# EAGLE board pybd-breakout (EAGLE 9.3.2)
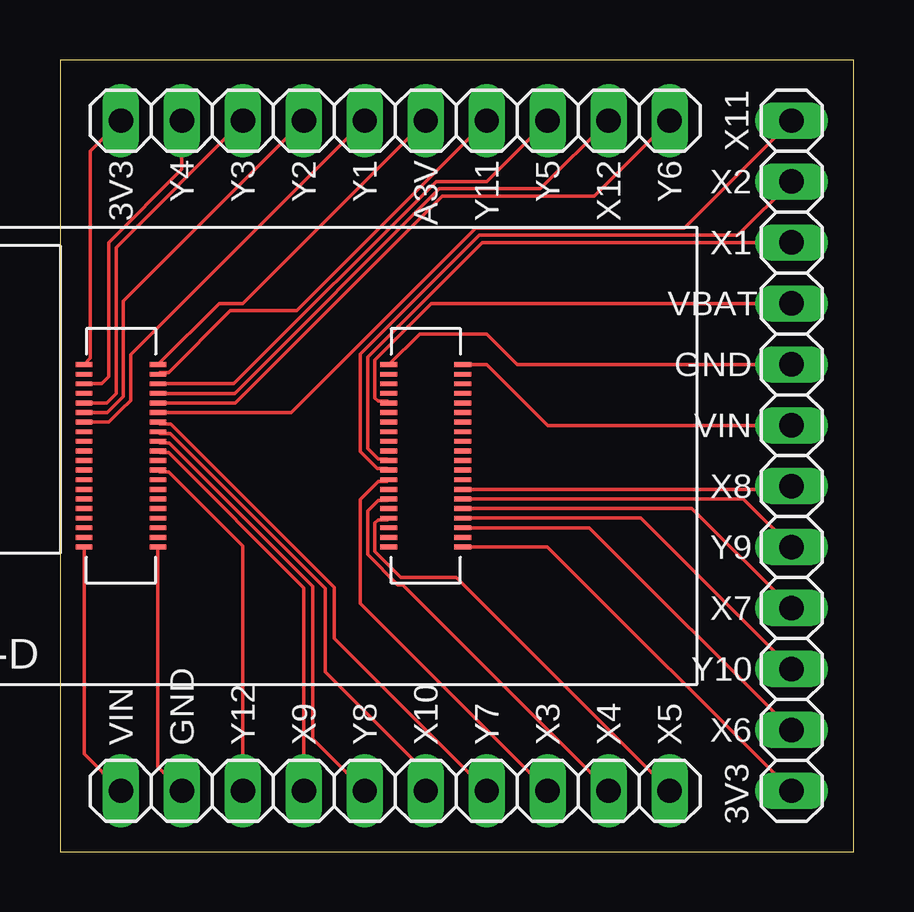
[diagram p0: board, top side]
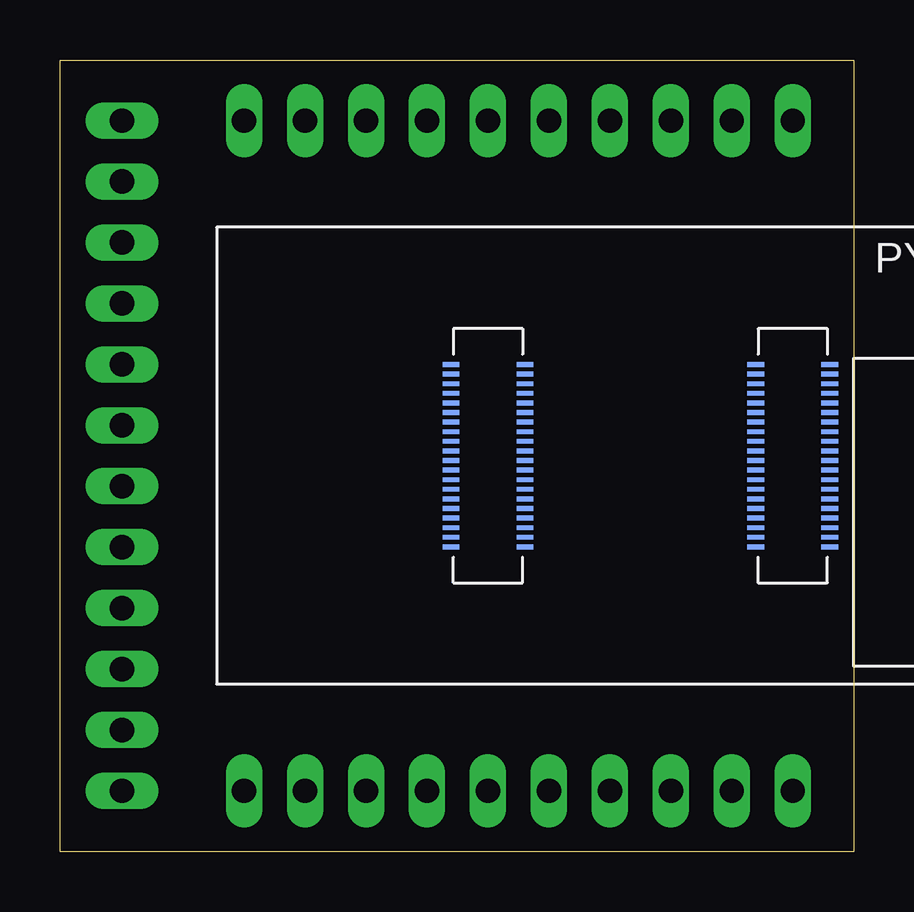
[diagram p1: board, bottom side, seen from below]

Size 33.07 x 33.01 mm. Coordinates in mm from the lower left corner, seen from the top.
Outline: 0,0 33.07,0 33.07,33.01 0,33.01 0,0
Copper layers (1*16): Top 0.035mm / dielectric 1.5mm / Bottom 0.035mm
Design rules "default": minimum track width 6mil, minimum drill 0.35mm, track to track 6mil, track to pad 6mil, pad to pad 6mil, via to via 6mil, smd to smd 6mil, copper to edge 40mil, drill to drill 6mil, minimum pad ring 10mil, minimum via ring 8mil, stop-mask expansion 4mil, vias tented up to drill 0mil, thermal gap 10mil

## Footprints (pad centres in the part's own frame; a part is rotated, then mirrored left to right if it is on the bottom)
1X12 = drill 1.016 long: 1 -13.97,0; 2 -11.43,0; 3 -8.89,0; 4 -6.35,0; 5 -3.81,0; 6 -1.27,0; 7 1.27,0; 8 3.81,0; 9 6.35,0; 10 8.89,0; 11 11.43,0; 12 13.97,0
1X10 = drill 1.016 long: 1 -11.43,0; 2 -8.89,0; 3 -6.35,0; 4 -3.81,0; 5 -1.27,0; 6 1.27,0; 7 3.81,0; 8 6.35,0; 9 8.89,0; 10 11.43,0
PYBD-WBUS = smd 0.7 x 0.2: 1 -4.81,5.07; 2 -7.89,5.07; 3 -4.81,4.67; 4 -7.89,4.67; 5 -4.81,4.27; 6 -7.89,4.27; 7 -4.81,3.87; 8 -7.89,3.87; 9 -4.81,3.47; 10 -7.89,3.47; 11 -4.81,3.07; 12 -7.89,3.07; 13 -4.81,2.67; 14 -7.89,2.67; 15 -4.81,2.27; 16 -7.89,2.27; 17 -4.81,1.87; 18 -7.89,1.87; 19 -4.81,1.47; 20 -7.89,1.47; 21 -4.81,1.07; 22 -7.89,1.07; 23 -4.81,0.67; 24 -7.89,0.67; 25 -4.81,0.27; 26 -7.89,0.27; 27 -4.81,-0.13; 28 -7.89,-0.13; 29 -4.81,-0.53; 30 -7.89,-0.53; 31 -4.81,-0.93; 32 -7.89,-0.93; 33 -4.81,-1.33; 34 -7.89,-1.33; 35 -4.81,-1.73; 36 -7.89,-1.73; 37 -4.81,-2.13; 38 -7.89,-2.13; 39 -4.81,-2.53; 40 -7.89,-2.53; 41 4.81,-2.53; 42 7.89,-2.53; 43 4.81,-2.13; 44 7.89,-2.13; 45 4.81,-1.73; 46 7.89,-1.73; 47 4.81,-1.33; 48 7.89,-1.33; 49 4.81,-0.93; 50 7.89,-0.93; 51 4.81,-0.53; 52 7.89,-0.53; 53 4.81,-0.13; 54 7.89,-0.13; 55 4.81,0.27; 56 7.89,0.27; 57 4.81,0.67; 58 7.89,0.67; 59 4.81,1.07; 60 7.89,1.07; 61 4.81,1.47; 62 7.89,1.47; 63 4.81,1.87; 64 7.89,1.87; 65 4.81,2.27; 66 7.89,2.27; 67 4.81,2.67; 68 7.89,2.67; 69 4.81,3.07; 70 7.89,3.07; 71 4.81,3.47; 72 7.89,3.47; 73 4.81,3.87; 74 7.89,3.87; 75 4.81,4.27; 76 7.89,4.27; 77 4.81,4.67; 78 7.89,4.67; 79 4.81,5.07; 80 7.89,5.07

## Placement (x,y rotation side)
JP3  [1X12]  30.48,16.51 270 top
JP4  [1X10]  13.97,2.54 0 top
JP5  [1X10]  13.97,30.48 0 top
U$1  PYBD-WBUS  [PYBD-WBUS]  8.89,15.24 0 top
U$2  PYBD-WBUS  [PYBD-WBUS]  8.89,17.78 180 bottom

## Library data of the parts
JP3-JP5 = pinhead
U$1 U$2 = mathieu

## Nets
N$1: JP3.12 U$1.42
N$3: JP5.3 U$1.10
N$5: JP5.1 U$1.2
N$10: JP5.4 U$1.12
N$12: JP5.2 U$1.6
N$14: JP4.1 U$1.40
N$15: JP5.6 U$1.1
N$16: JP4.4 U$1.19
N$17: JP5.7 U$1.3
N$18: JP5.8 U$1.5
N$19: JP5.9 U$1.7
N$20: JP5.10 U$1.9
N$21: JP3.1 U$1.11
N$22: JP4.3 U$1.23
N$23: JP4.5 U$1.17
N$24: JP4.6 U$1.15
N$25: JP4.7 U$1.13
N$26: JP4.2 U$1.39
N$27: JP3.5 U$1.79
N$28: JP3.6 U$1.80
N$29: JP3.4 U$1.71
N$30: JP3.3 U$1.59
N$31: JP4.10 U$1.47
N$32: JP4.9 U$1.51
N$33: JP4.8 U$1.55
N$34: JP3.2 U$1.57
N$35: JP3.7 U$1.54
N$36: JP3.8 U$1.52
N$37: JP3.9 U$1.50
N$38: JP3.10 U$1.48
N$39: JP3.11 U$1.46
N$41: JP5.5 U$1.14

## Tracks (layer width: path | path; a pad name or v marks a point on that pad's centre or on a via)
N$1
  Top 0.152: U$1.42 20.31,12.71 JP3.12
N$3
  Top 0.152: U$1.10 1.95,18.71 2.34,19.1 2.34,25.2 JP5.3
N$5
  Top 0.152: U$1.2 1.27,20.58 1.27,29.21 JP5.1
N$10
  Top 0.152: JP5.4 2.64,22.96 2.64,18.98 1.98,18.31 U$1.12
N$12
  Top 0.152: U$1.6 1.73,19.51 2.03,19.81 2.03,25.4 5.08,28.45 JP5.2
N$14
  Top 0.152: U$1.40 1,4.08 JP4.1
N$15
  Top 0.152: U$1.1 6.63,22.86 7.62,22.86 JP5.6
N$16
  Top 0.152: U$1.19 4.15,16.64 4.53,16.64 10.16,11 JP4.4
N$17
  Top 0.152: U$1.3 4.15,19.98 4.53,19.98 7.1,22.55 9.86,22.55 JP5.7
N$18
  Top 0.152: U$1.5 7.24,19.51 15.67,27.94 17.78,27.94 JP5.8
N$19
  Top 0.152: JP5.9 20.02,27.64 15.8,27.64 7.27,19.11 U$1.7
N$20
  Top 0.152: JP5.10 22.25,27.33 15.92,27.33 7.3,18.71 U$1.9
N$21
  Top 0.152: JP3.1 26.01,26.01 17.33,26.01 9.63,18.31 U$1.11
N$22
  Top 0.152: U$1.23 4.15,15.84 4.53,15.84 7.62,12.74 JP4.3
N$23
  Top 0.152: U$1.17 4.15,17.04 4.56,17.04 10.54,11.05 10.54,4.7 JP4.5
N$24
  Top 0.152: U$1.15 4.15,17.44 4.59,17.44 11.05,10.98 11.05,7.49 15.24,3.3 JP4.6
N$25
  Top 0.152: U$1.13 4.15,17.84 4.62,17.84 11.43,11.03 11.43,8.89 JP4.7
N$26
  Top 0.152: U$1.39 4.08,3.54 JP4.2
N$27
  Top 0.152: U$1.79 14.98,21.59 17.78,21.59 19.05,20.32 JP3.5
N$28
  Top 0.152: U$1.80 17.77,20.31 17.78,20.32 20.32,17.78 JP3.6
N$29
  Top 0.152: U$1.71 13.63,18.78 13.26,18.78 13.12,18.91 13.12,20.5 15.48,22.86 JP3.4
N$30
  Top 0.152: U$1.59 13.63,16.38 13.26,16.38 12.82,16.82 12.82,20.63 17.59,25.4 JP3.3
N$31
  Top 0.152: U$1.47 13.63,13.84 13.26,13.84 13.12,13.71 13.12,12.52 14.21,11.43 16.51,11.43 JP4.10
N$32
  Top 0.152: JP4.9 14.28,11.12 14.08,11.12 12.82,12.39 12.82,14.2 13.26,14.64 13.63,14.64 U$1.51
N$33
  Top 0.152: U$1.55 13.63,15.44 13.26,15.44 12.51,14.7 12.51,10.35 JP4.8
N$34
  Top 0.152: U$1.57 13.63,15.98 13.22,15.98 12.51,16.69 12.51,20.76 17.46,25.7 28.25,25.7 JP3.2
N$35
  Top 0.152: U$1.54 30.35,15.11 JP3.7
N$36
  Top 0.152: U$1.52 28.47,14.71 JP3.8
N$37
  Top 0.152: U$1.50 26.33,14.31 JP3.9
N$38
  Top 0.152: U$1.48 24.19,13.91 JP3.10
N$39
  Top 0.152: U$1.46 22.05,13.51 JP3.11
N$41
  Top 0.152: U$1.14 2.04,17.91 2.22,18.1 2.54,18.41 2.95,18.82 2.95,20.73 JP5.5

## Text on the board
tPlace: X11 | 3V3 | Y4 | Y3 | Y2 | Y1 | A3V | Y11 | Y5 | X12 | Y6 | X2 | X1 | VBAT | GND | VIN | X8 | Y9 | X7 | Y10 | X6 | VIN | GND | Y12 | X9 | Y8 | X10 | Y7 | X3 | X4 | X5 | 3V3